# Altium PCB MotorCtrl.PcbDoc
Units mm, origin at the board's own origin, x right, y up, seen from the top; angles counter-clockwise.
Board outline 45.68 x 31.88 mm, 2 copper layers (Top Layer, Bottom Layer); 23 components, 24 nets, 97 pads, 258 vias.
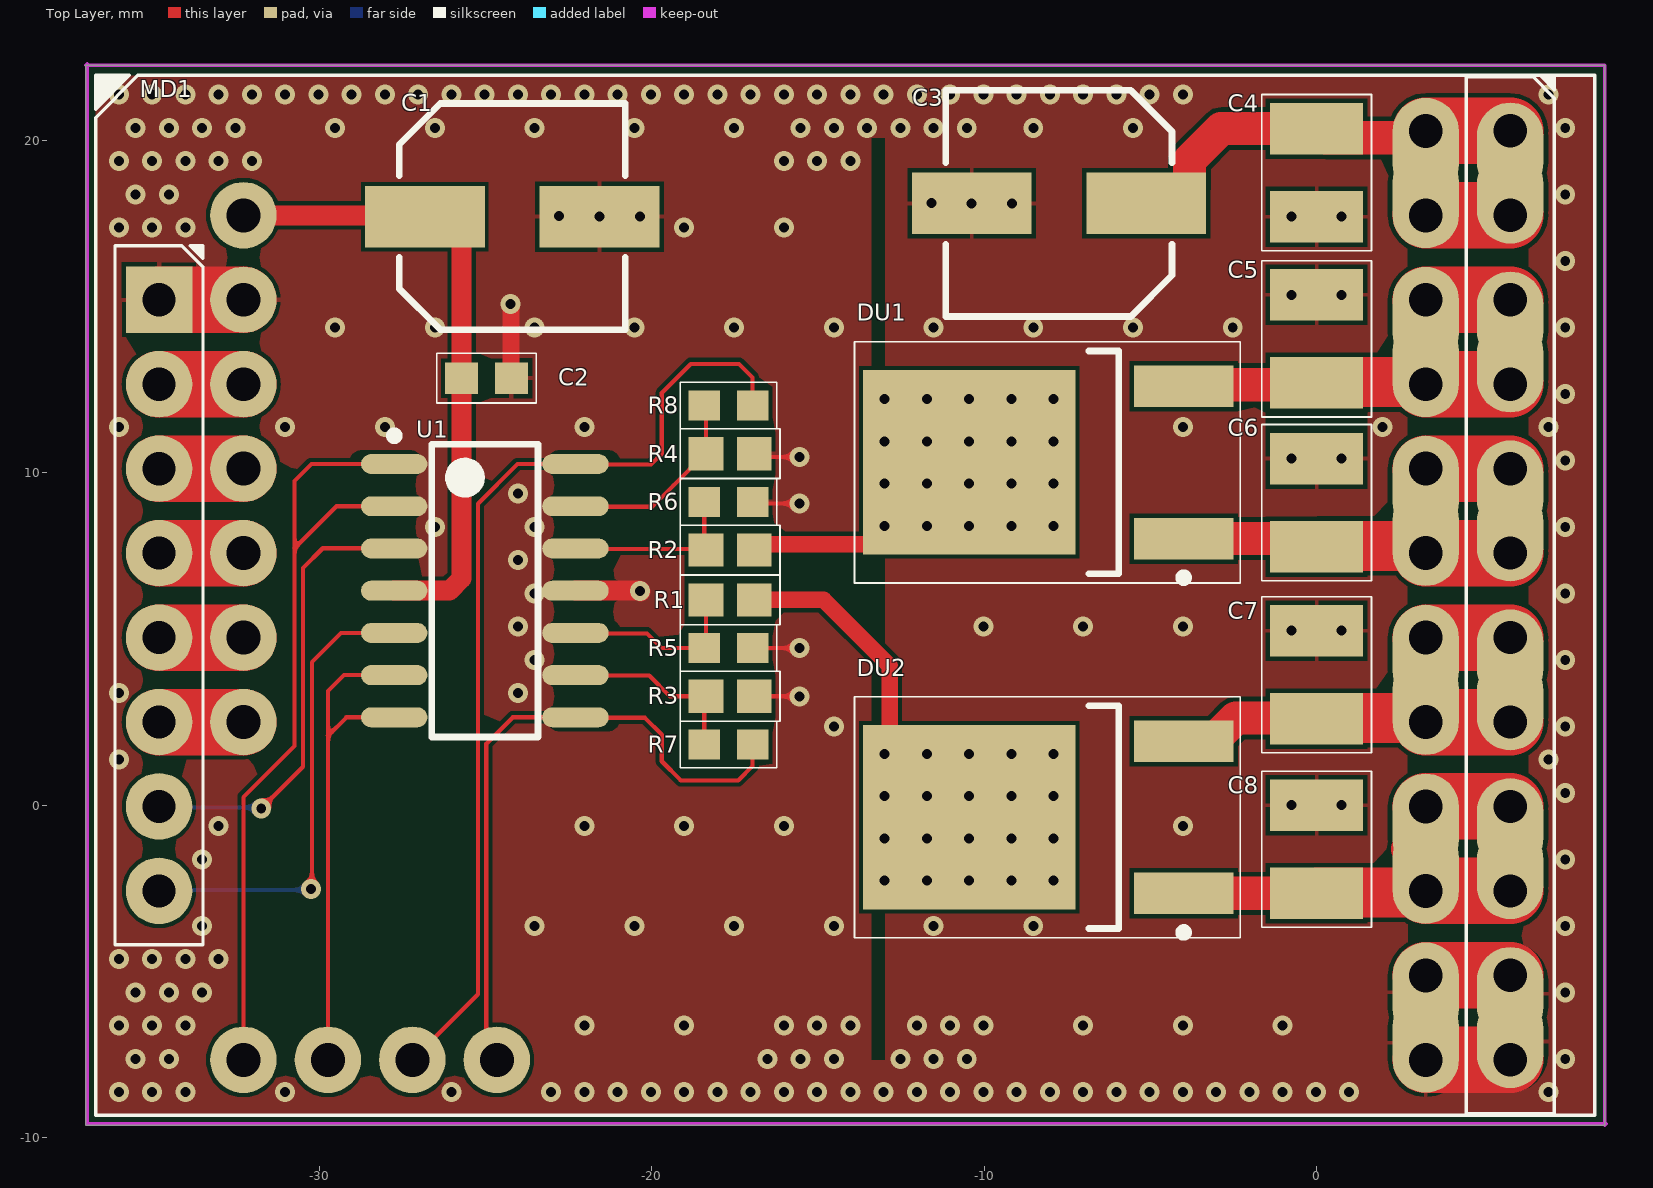
[diagram p0: Top Layer view]
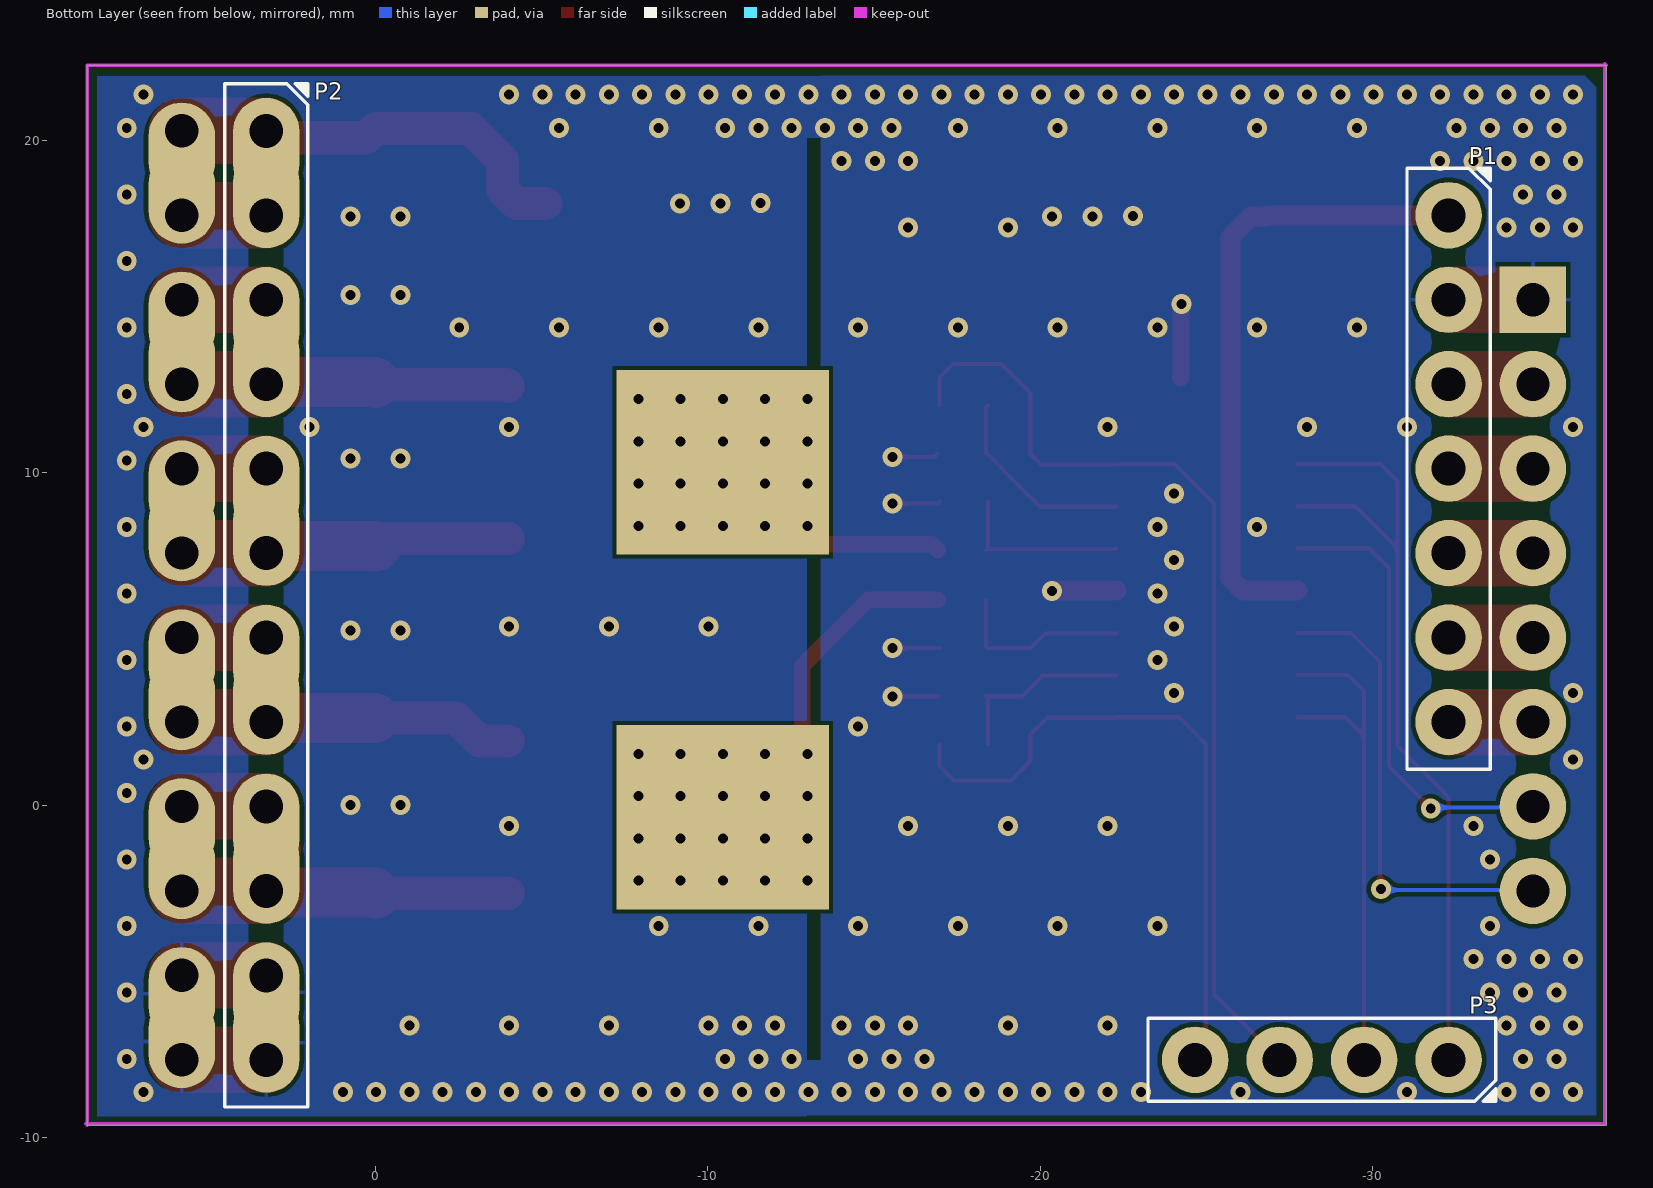
[diagram p1: Bottom Layer view, seen from below]
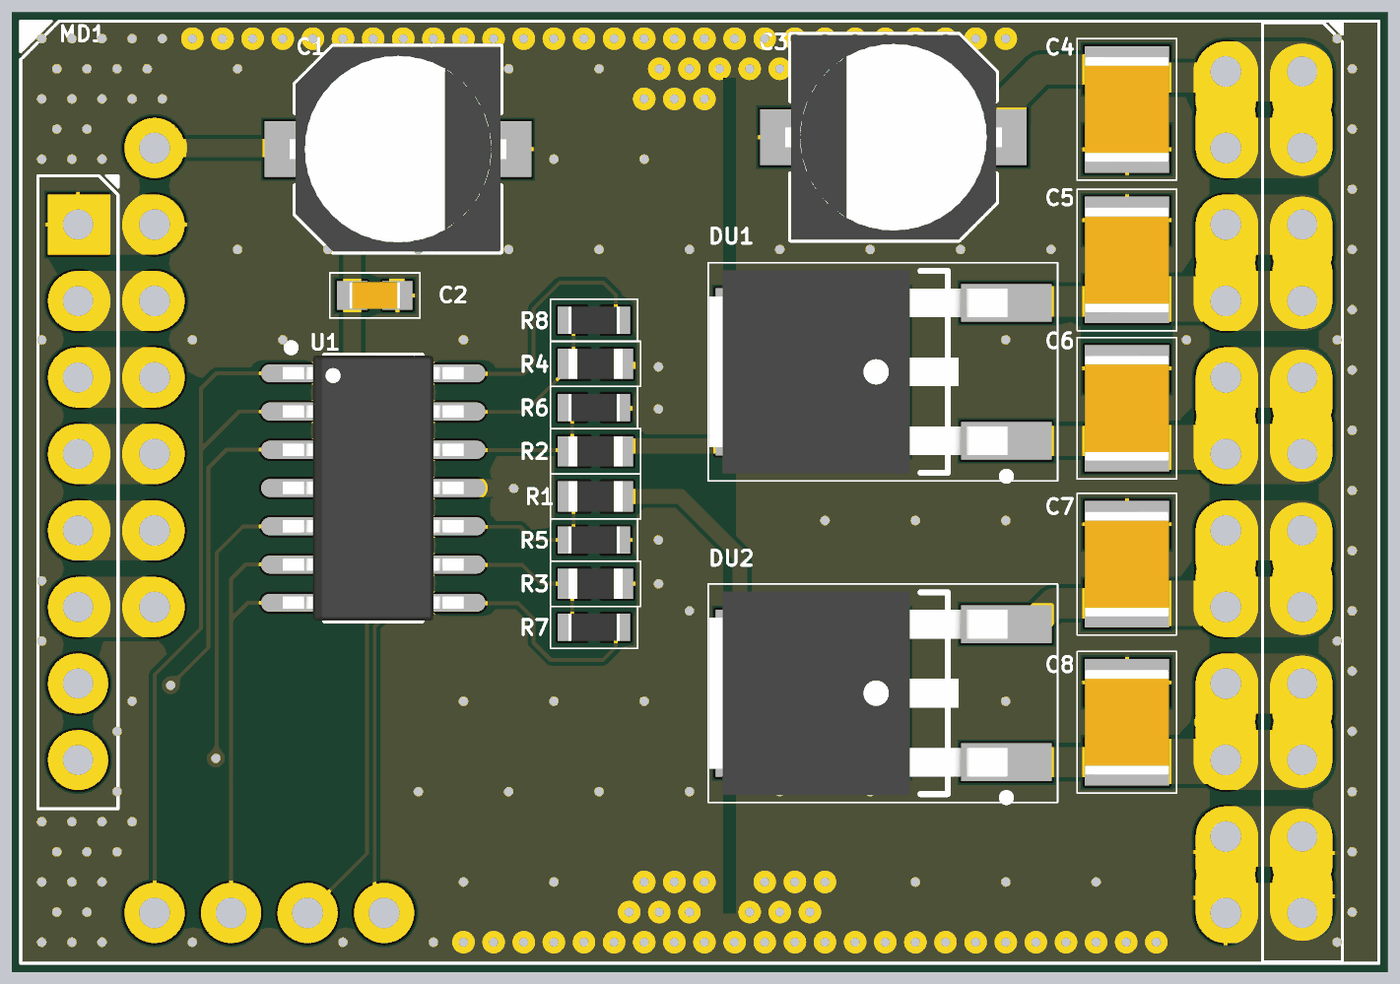
[diagram p2: 3D render of the assembled board from above, using the file's embedded part models]

## Layer stack, top to bottom
Top Solder: solder mask 0.0102, Solder Resist, Dk 3.5
Top Layer: signal copper 0.0356
Dielectric 1: dielectric 0.32, FR-4, Dk 4.8
Bottom Layer: signal copper 0.0356
Bottom Solder: solder mask 0.0102, Solder Resist, Dk 3.5

## Board outline
-37.022,-9.627 -37.022,22.252 8.662,22.252 8.662,-9.627

## Design rules (kind name [scope] priority, off if disabled: settings)
BoardOutlineClearance [All] p1: gap=0.2 ignorepadtopadclearanceinfootprint=FALSE
Clearance "Stitching A_GND" [IsStitchingVia and InNet('A_GND') vs (IsVia and (Not IsStitchingVia)) Or IsPad] p1: gap=0.127 ignorepadtopadclearanceinfootprint=FALSE
Clearance [All] p2: gap=0.127 ignorepadtopadclearanceinfootprint=TRUE except(0.25: Arc-Hole Track-Hole SMDPad-Hole THPad-Hole Via-Hole Fill-Hole Poly-Hole Region-Hole Text-Hole)
ComponentClearance [All] p1 off: gap=0.127 collisioncheckmode=3 verticalgap=0.127 showdistances=TRUE
DiffPairsRouting [All] p1: maxlimit=0.254 minlimit=0.127 mostfreqgap=0.127 toplayer_minwidth=0.127 toplayer_maxwidth=25.4 toplayer_prefwidth=0.127 bottomlayer_minwidth=0.127 bottomlayer_maxwidth=25.4 bottomlayer_prefwidth=0.127 maxuncoupledlength=12.7
FabricationTestpoint [All] p1: side=3 testpointundercomponent=TRUE minsize=1.016 maxsize=2.54 preferedsize=1.524 minholesize=0 maxholesize=1.016 preferedholesize=0.813 testpointgrid=0.025 allowsidetop=TRUE allowsidebottom=TRUE usegrid=TRUE gridtolerance=0
Height [All] p1: minheight=0 maxheight=1816.048 prefheight=12.7
HoleSize [All] p1: absolutevalues=TRUE maxlimit=6.3 minlimit=0.3 maxpercent=80.000 minpercent=20.000
HoleToHoleClearance [All] p1: gap=0.25 allowstackedmicrovias=FALSE
MinimumAnnularRing [All] p1: minimumring=0.076
MinimumSolderMaskSliver [All] p1: minsoldermaskwidth=0
PlaneClearance [All] p1: clearance=0.127
PlaneConnect PlaneConnectPowerPads [InPadClass('PowerPads')] p1: planeconnectstyle=Direct reliefexpansion=0.508 reliefentries=4 reliefconductorwidth=0.254 reliefairgap=0.254
PlaneConnect [All] p2: pad.planeconnectstyle=Relief pad.reliefexpansion=0.3 pad.reliefentries=4 pad.reliefconductorwidth=0.127 pad.reliefairgap=0.127 via.planeconnectstyle=Direct via.reliefexpansion=0.3 via.reliefentries=4 via.reliefconductorwidth=0.127 via.reliefairgap=0.127
PolygonConnect PolygonConnectPowerPads [All vs (InPadClass('PowerPads'))] p1: connectstyle=Direct reliefconductorwidth=0.254 reliefentries=4 polygonreliefangle="90 Angle" airgapwidth=0.254
PolygonConnect [All] p2: thpad.connectstyle=Relief thpad.reliefconductorwidth=0.127 thpad.reliefentries=4 thpad.polygonreliefangle="90 Angle" thpad.airgapwidth=0.127 smdpad.connectstyle=Relief smdpad.reliefconductorwidth=0.127 smdpad.reliefentries=4 smdpad.polygonreliefangle="90 Angle" smdpad.airgapwidth=0.127 via.connectstyle=Direct via.reliefconductorwidth=0.127 via.reliefentries=4 via.polygonreliefangle="90 Angle" via.airgapwidth=0.127
RoutingVias [All] p1: holewidth=0.3 width=0.6 viastyle="Through Hole" minholewidth=0.3 minwidth=0.6 maxholewidth=0.6 maxwidth=6.6
SilkToSilkClearance [All] p1: silktosilkclearance=0
SilkToSolderMaskClearance [IsPad] p1: minsilkscreentomaskgap=0.127 clearancetoexposedcopper=TRUE
SolderMaskExpansion [All] p1: expansion=0.075 istentingtop=FALSE
Width "Schematic Width Constraint" [InComponent('U1')] p1: maxlimit=0.6 minlimit=0.1 preferedwidth=0.2
Width [All] p2: maxlimit=25.4 minlimit=0.127 preferedwidth=0.2 minimp=50.000000 maximp=50.000000 favimp=50.000000
19 further rules are at their usual default settings.

## Components (designator, comment, footprint, x,y, rotation, side; value= is the part's Value field where it differs from the comment)
C1 "220uF" VZT221M1ETR-0607#1 -24.195,17.705 r0 top
C2 "0.1uF" CL10B104KA8NNNC -24.967,12.848 r180 top
C3 "220uF" VZT221M1ETR-0607#2 -7.75,18.1 r180 top
C4 "0.1uF" 1210B104K500NT 0,19.025 r270 top
C5 "0.1uF" 1210B104K500NT 0,14.025 r90 top
C6 "0.1uF" 1210B104K500NT 0,9.1 r90 top
C7 "0.1uF" 1210B104K500NT 0,3.925 r90 top
C8 "0.1uF" 1210B104K500NT 0,-1.325 r90 top
DU1 "MBRD1035CTLT4G" MBRD1035CTLT4G -10.45,10.31 r180 top
DU2 "MBRD1035CTLT4G" MBRD1035CTLT4G -10.45,-0.36 r180 top
MD1 "MD02" MD02 -34.817,15.202 r0 top locked
P1 "Header 7" KH-2.54PH180-1X7P-L11.5 -32.277,17.742 r270 bottom
P2 "Header 12" "KH-2.54PH180-1X12P-L11.5 (PAD LINKED)" 3.283,20.282 r270 bottom
P3 "Header 4" KH-2.54PH180-1X4P-L11.5 -23.237,-7.658 r0 bottom
R1 "12k" PTFR0603B12K0N9 -17.64,6.175 r0 top
R2 "12k" PTFR0603B12K0N9 -17.64,7.675 r0 top
R3 "12k" PTFR0603B12K0N9 -17.64,3.275 r0 top
R4 "12k" PTFR0603B12K0N9 -17.64,10.575 r0 top
R5 "3.3k" 0603WAF3301T5E -17.69,4.725 r0 top
R6 "3.3k" 0603WAF3301T5E -17.69,9.125 r0 top
R7 "3.3k" 0603WAF3301T5E -17.69,1.825 r180 top
R8 "3.3k" 0603WAF3301T5E -17.69,12.025 r180 top
U1 "OPA4277UA/2K5" OPA4277UA/2K5 -25.017,6.452 r0 top

## Footprints (in the part's own frame and the unit in brackets; to place one, negate y for a bottom-side part, rotate by r counter-clockwise, add the part's x,y. Pads: shape width x height; smd on the part's side, far side on the other; paste and mask are expansions set on the pad)
0603WAF3301T5E [mm] "0603 SMD 3.3k 1% Res"
  rect 0.95x0.9 smd: 1(-0.725,0) 2(0.725,0)
  silkscreen extent -1.45,-0.7 1.45,0.7, body extent -0.85,-0.45 0.85,0.45, height 0.55
1210B104K500NT [mm] "50V 100nF X7R ±10% 1210  Multilayer Ceramic Capacitors MLCC - SMD/SMT ROHS"
  rect 1.55x2.8 smd: 1(-1.325,0) 2(1.325,0)
  silkscreen extent -2.35,-1.65 2.35,1.65, body extent -1.75,-1.4 1.75,1.4, height 2.8
CL10B104KA8NNNC [mm] "0603 25V 100nF MLCC"
  rect 1x0.95 smd: 1(-0.75,0) 2(0.75,0)
  silkscreen extent -1.5,-0.75 1.5,0.75, body extent -0.85,-0.45 0.85,0.45, height 0.55
KH-2.54PH180-1X4P-L11.5 [mm] "1x4P Pin Headers"
  round 2 hole 1.02: 1(-9.04,0) 2(-6.5,0) 3(-3.96,0) 4(-1.42,0)
  silkscreen extent -10.46,-1.25 0,1.25, body extent -10.46,-1.25 0,1.25, height 8.9
KH-2.54PH180-1X7P-L11.5 [mm] "1x7P Pin Headers"
  round 2 hole 1.02: 1(0,0) 2(2.54,0) 3(5.08,0) 4(7.62,0) 5(10.16,0) 6(12.7,0) 7(15.24,0)
  silkscreen extent -1.42,-1.25 16.66,1.25, body extent -1.42,-1.25 16.66,1.25, height 8.9
"KH-2.54PH180-1X12P-L11.5 (PAD LINKED)" [mm] "Two Pad Linked, 1x12P Pin Headers"
  oval 3x2 hole 1.02 copper offset 0.51,0: 1(0,0) 3(5.08,0) 5(10.16,0) 7(15.24,0) 9(20.32,0) 11(25.4,0)
  oval 3x2 hole 1.02 copper offset -0.51,0: 2(2.54,0) 4(7.62,0) 6(12.7,0) 8(17.78,0) 10(22.86,0) 12(27.94,0)
  silkscreen extent -1.42,-1.25 29.36,1.25, body extent -1.42,-1.25 29.36,1.25, height 8.9
MBRD1035CTLT4G [mm] "35V 5A 2Channel Diode IC"
  rect 3x1.25 smd: 1(-6.45,2.29) 3(-6.45,-2.29)
  rect 6.4x5.55 smd: 4(0,0)
  rect 6.4x5.55 smd far side: 4(0,0)
  silkscreen extent -8.15,-3.62 3.45,3.63, body extent -6.49,-3.37 3.41,3.37, height 2.51
MD02 [mm] "MD02_17A_Motor_Driver"
  rect 2x2 hole 1: 1(0,0)
  round 2 hole 1: 2(0,-2.54) 3(0,-5.08) 4(0,-7.62) 5(0,-10.16) 6(0,-12.7) 7(0,-15.24) 8(0,-17.78)
  oval 2x2.8 hole 1 copper offset 0,0.55: 9(40.64,2.54) 10(40.64,-2.54) 11(40.64,-7.62) 12(40.64,-12.7) 13(40.64,-17.78) 14(40.64,-22.86)
  oval 2x2.8 hole 1 copper offset 0,-0.55: 9(40.64,5.08) 10(40.64,0) 11(40.64,-5.08) 12(40.64,-10.16) 13(40.64,-15.24) 14(40.64,-20.32)
  silkscreen extent -1.91,-24.53 43.18,6.75, body extent -1.34,-24.48 41.97,6.73, height 8.65
OPA4277UA/2K5 [mm] "SOP-14_3.9x8.7x1.27P"
  oval 2x0.6 smd: 1(-2.725,3.81) 2(-2.725,2.54) 3(-2.725,1.27) 4(-2.725,0) 5(-2.725,-1.27) 6(-2.725,-2.54) 7(-2.725,-3.81) 8(2.725,-3.81) 9(2.725,-2.54) 10(2.725,-1.27) 11(2.725,0) 12(2.725,1.27) 13(2.725,2.54) 14(2.725,3.81)
  silkscreen extent -2.85,-4.4 1.6,4.78, body extent -3,-4.4 3,4.4, height 1.75
PTFR0603B12K0N9 [mm] "0603 SMD 12k 0.1% Res"
  rect 1.05x1 smd: 1(-0.725,0) 2(0.725,0)
  silkscreen extent -1.5,-0.75 1.5,0.75, body extent -0.9,-0.5 0.9,0.5, height 0.5
VZT221M1ETR-0607#1 [mm] "SMD 6.3x7.7mm 220uF 25V Capacitor"
  rect 3.6x1.85 smd: 1(-2.625,0) ""(2.625,0)
  silkscreen extent -3.4,-3.4 3.4,3.4, body extent -3.6,-3.4 3.6,3.4, height 8
VZT221M1ETR-0607#2 [mm] "SMD 6.3x7.7mm 220uF 25V Capacitor"
  rect 3.6x1.85 smd: 1(-2.625,0) 2(2.625,0)
  silkscreen extent -3.4,-3.4 3.4,3.4, body extent -3.6,-3.4 3.6,3.4, height 8

## Part data
C1 C3: library part "Cap Pol1", "-45℃~+105℃ 2000hrs@105℃ 220uF 7.7mm 25V 6.3mm ±20% SMD,6.3x7.7mm  Aluminum Electrolytic Capacitors - SMD ROHS", LatestRevisionDate=17-Jul-2002, LatestRevisionNote="Re-released for DXP Platform.", PackageDescription="Polarized Capacitor (Radial); 2 Leads", PackageReference=RB7.6-15, Published=8-Jun-2000, Publisher="Altium Limited"
C2: library part "Cap Semi", "25V 100nF X7R ±10% 0603  Multilayer Ceramic Capacitors MLCC - SMD/SMT ROHS", LatestRevisionDate=29-May-2009, LatestRevisionNote="IPC-7351 Footprint Added.", PackageDescription="Chip Capacitor", PackageReference=C1206, Published=8-Jun-2000, Publisher="Altium Limited"
C4 C5 C6 C7 C8: library part "Cap Semi", "50V 100nF X7R ±10% 1210  Multilayer Ceramic Capacitors MLCC - SMD/SMT ROHS", LatestRevisionDate=29-May-2009, LatestRevisionNote="IPC-7351 Footprint Added.", PackageDescription="Chip Capacitor", PackageReference=C1206, Published=8-Jun-2000, Publisher="Altium Limited"
DU1 DU2: "35V 470mV@5A 5A TO-252-2(DPAK) Schottky Barrier Diodes (SBD) ROHS", buy_link=https://www.ruten.com.tw/item/show?21744290003226, datasheet=https://datasheet.ciiva.com/905/mbrd1035ctl-d-905952.pdf?src-supplier=Digi-Key
MD1: library part "MD02 Motor Driver", "MD02 17A 2 cheel motor driver", buy_link=https://www.ruten.com.tw/item/show?21811773783671
P1: "3A Straight Square Pins 2.5mm 6mm -40℃~+105℃ 1 7 3mm 2.54mm Black 1x7P Plugin,P=2.54mm  Pin Headers ROHS", LatestRevisionDate=17-Jul-2002, LatestRevisionNote="Re-released for DXP Platform.", Publisher="Altium Limited"
P2: "3A Straight Square Pins 2.5mm 6mm -40℃~+105℃ 1 12 3mm 2.54mm Black 1x12P Plugin,P=2.54mm  Pin Headers ROHS", LatestRevisionDate=17-Jul-2002, LatestRevisionNote="Re-released for DXP Platform.", Publisher="Altium Limited"
P3: "3A Straight Square Pins 2.5mm 6mm -40℃~+105℃ 1 4 3mm 2.54mm Black 1x4P Plugin,P=2.54mm  Pin Headers ROHS", LatestRevisionDate=17-Jul-2002, LatestRevisionNote="Re-released for DXP Platform.", Publisher="Altium Limited"
R1 R2 R3 R4 R5 R6 R7 R8: library part Res1, "Resistor", LatestRevisionDate=17-Jul-2002, LatestRevisionNote="Re-released for DXP Platform.", PackageDescription="Axial Device, Thru-Hole; 2 Leads; 0.3 in Pin Spacing", PackageReference=AXIAL-0.3, Published=8-Jun-2000, Publisher="Altium Limited"
U1: "790μA 1MHz 4 4V~36V,±2V~18V 0.8 V/us General Purpose SOIC-14  Precision OpAmps ROHS"

## Via types
v1: diameter 0.6, hole 0.3, Top Layer to Bottom Layer, 136 vias
v2: diameter 0.6, hole 0.3, Top Layer to Bottom Layer, tented both sides, 122 vias

## Nets (pads, with @x,y where several pads share a name; then routed paths per layer and width w, separated by ;. In a path a pad name is that pad's centre, name@x,y a point inside that pad or via, vN(x,y) a via of type N, cw(c..) or ccw(c..) an arc to the next point about the centre after c; other vN are vias at no path point)
A_12V: C3.1 C4.1 MD1.9 P2.1 P2.2 | length 15.2
  Top Layer w1: C3.1 -4.25,18.1 -3.825,18.525 -3.825,19.4 -2.875,20.35 C4.1 0.275,20.075 3.075,20.075 P2.1 ; P2.2@3.213,17.673 P2.2
  Top Layer w2: P2.2 MD1.9@5.823,17.742 ; P2.1 MD1.9@5.823,20.282
A_GND: C1. C2.1 C3.2 C4.2 C5.2 C6.2 C7.2 C8.2 MD1.1 MD1.14 P1.2 P2.11 P2.12 R3.2 R4.2 R5.2 R6.2 U1.11 | length 17.4
  Top Layer w0.127: R5.2 v2(-15.55,4.725) ; R6.2 -16.916,9.075 v2(-15.55,9.075) ; R3.2 -15.55,3.275 v2(-15.548,3.273) ; R4.2 -16.816,10.475 v2(-15.55,10.475)
  Top Layer w0.5: v2(-24.247,15.072) -24.232,15.057 -24.232,12.863 C2.1
  Top Layer w0.6: U1.11 -20.367,6.452 v2(-20.355,6.44) v2@-20.342,6.428
  Top Layer w2: MD1.1 P1.2 ; P2.12 MD1.14@5.823,-7.658 ; P2.11 MD1.14@5.823,-5.118
  other v1: -22.022,-8.627 -21.022,-8.627 -20.022,-8.627 -19.022,-8.627 -18.022,-8.627 -17.022,-8.627 -16.022,-8.627 -15.022,-8.627 -14.022,-8.627 -13.022,-8.627 -12.022,-8.627 -11.022,-8.627 -10.022,-8.627 -9.022,-8.627 -8.022,-8.627 -7.022,-8.627 -6.022,-8.627 -5.022,-8.627 -4.022,-8.627 -3.022,-8.627 -2.022,-8.627 -1.022,-8.627 -0.022,-8.627 0.978,-8.627 -16.522,-7.627 -15.522,-7.627 -14.522,-7.627 -12.522,-7.627 -11.522,-7.627 -10.522,-7.627 -16.022,-6.627 -15.022,-6.627 -14.022,-6.627 -12.022,-6.627 -11.022,-6.627 -10.022,-6.627 -0.75,0 0.75,0 -24.022,3.373 -23.522,4.373 -0.75,5.25 0.75,5.25 -24.022,5.373 -23.522,6.373 -24.022,7.373 -23.522,8.373 -24.022,9.373 -0.75,10.425 0.75,10.425 -0.75,15.35 0.75,15.35 -21.57,17.705 -20.354,17.705 -0.75,17.7 0.75,17.7 -22.785,17.721 -11.59,18.116 -10.375,18.1 -9.159,18.1 -16.022,19.373 -15.022,19.373 -14.022,19.373 -15.522,20.373 -14.522,20.373 -13.522,20.373 -12.522,20.373 -11.522,20.373 -10.522,20.373 -31.022,21.373 -30.022,21.373 -29.022,21.373 -28.022,21.373 -27.022,21.373 -26.022,21.373 -25.022,21.373 -24.022,21.373 -23.022,21.373 -22.022,21.373 -21.022,21.373 -20.022,21.373 -19.022,21.373 -18.022,21.373 -17.022,21.373 -16.022,21.373 -15.022,21.373 -14.022,21.373 -13.022,21.373 -12.022,21.373 -11.022,21.373 -10.022,21.373 -9.022,21.373 -8.022,21.373 -7.022,21.373 -6.022,21.373 -5.022,21.373 -4.022,21.373
  other v2: -36.022,-8.627 -35.022,-8.627 -34.022,-8.627 -31.022,-8.627 -26.022,-8.627 -23.022,-8.627 6.978,-8.627 -35.522,-7.627 -34.522,-7.627 7.478,-7.627 -36.022,-6.627 -35.022,-6.627 -34.022,-6.628 -34.022,-6.627 -22.023,-6.628 -19.023,-6.628 -16.023,-6.628 -10.023,-6.628 -7.023,-6.628 -4.023,-6.628 -1.023,-6.628 -35.522,-5.627 -34.522,-5.627 -33.522,-5.627 7.478,-5.627 -36.022,-4.627 -35.022,-4.627 -34.022,-4.627 -33.022,-4.627 -33.522,-3.627 -23.523,-3.628 -20.523,-3.628 -17.523,-3.628 -14.523,-3.628 -11.523,-3.628 -8.523,-3.628 7.478,-3.627 -33.522,-1.627 7.478,-1.627 -33.022,-0.627 -22.023,-0.628 -19.023,-0.628 -16.023,-0.628 -4.023,-0.628 7.478,0.373 -36.022,1.373 6.978,1.373 -14.523,2.372 7.478,2.373 -36.022,3.373 7.478,4.373 -10.023,5.372 -7.023,5.372 -4.023,5.372 7.478,6.373 -26.523,8.372 -23.523,8.372 7.478,8.373 7.478,10.373 -36.022,11.373 -31.023,11.372 -28.023,11.372 -22.023,11.372 -4.023,11.372 1.977,11.372 6.978,11.373 7.478,12.373 -29.523,14.372 -26.523,14.372 -23.523,14.372 -20.523,14.372 -17.523,14.372 -14.523,14.372 -11.523,14.372 -8.523,14.372 -5.523,14.372 -2.523,14.372 7.478,14.373 7.478,16.373 -36.022,17.373 -35.022,17.373 -34.022,17.372 -34.022,17.373 -19.023,17.372 -16.023,17.372 -35.522,18.373 -34.522,18.373 7.478,18.373 -36.022,19.373 -35.022,19.373 -34.022,19.373 -33.022,19.373 -32.022,19.373 -35.522,20.373 -34.522,20.373 -33.522,20.373 -32.523,20.372 -32.522,20.373 -29.523,20.372 -26.523,20.372 -23.523,20.372 -20.523,20.372 -17.523,20.372 -14.523,20.372 -11.523,20.372 -8.523,20.372 -5.523,20.372 7.478,20.373 -36.022,21.373 -35.022,21.373 -34.022,21.373 -33.022,21.373 -32.022,21.373 6.978,21.373
CSA_Origin: MD1.7 U1.3 | length 13.8
  Top Layer w0.127: v2(-31.742,-0.098) -30.488,1.157 -30.488,7.132 -29.893,7.728 -27.748,7.728 U1.3
  Bottom Layer w0.127: MD1.7 -34.787,-0.068 -31.772,-0.068 v2(-31.742,-0.098)
CSB_Origin: MD1.8 U1.5 | length 14.3
  Top Layer w0.127: v2(-30.242,-2.522) -30.217,-2.497 -30.217,4.303 -29.342,5.178 -27.747,5.178 U1.5
  Bottom Layer w0.127: MD1.8 -34.79,-2.55 -30.27,-2.55 v2(-30.242,-2.522)
D_5V: C1.1 C2.2 P1.1 U1.4 | length 19.3
  Top Layer w0.6: P1.1 -26.858,17.742 C1.1 -26.342,17.705 -25.717,17.08 C2.2 -25.717,6.818 -26.083,6.452 U1.4
Drive_EN: MD1.6 P1.7 | length 2.5
  Top Layer w2: MD1.6 P1.7
MA1: C5.1 DU1.3 MD1.10 P2.3 P2.4 | length 12.4
  Top Layer w1: DU1.3 -3.95,12.65 -0.05,12.65 C5.1
  Top Layer w1.5: C5.1 0.025,12.725 3.22,12.725 P2.4
  Top Layer w2: P2.4 MD1.10@5.823,12.662 ; P2.3 MD1.10@5.823,15.202
MA2: C6.1 DU1.1 MD1.11 P2.5 P2.6 | length 12.6
  Top Layer w1: DU1.1 -0.245,8.02 C6.1
  Top Layer w1.5: C6.1 0.025,7.8 3.065,7.8 P2.6
  Top Layer w2: P2.6 MD1.11@5.823,7.582 ; P2.5 MD1.11@5.823,10.122
MA_DIR: MD1.2 P1.3 | length 2.5
  Top Layer w2: MD1.2 P1.3
MA_PWM: MD1.3 P1.4 | length 2.5
  Top Layer w2: MD1.3 P1.4
MAV_Origin: DU1.4 R2.2 | length 9.9
  Top Layer w0.5: R2.2 -16.738,7.852 DU1.4@-13.518,7.852 ; DU1.4@-11.97,9.675 -11.833,9.538 -13.102,8.268 DU1.4@-13.518,7.852 ; DU1.4@-10.7,10.31 -11.06,10.31 DU1.4@-13.518,7.852
  other v1: -12.99,8.405 -11.72,8.405 -10.45,8.405 -9.18,8.405 -7.91,8.405 -12.99,9.675 -11.72,9.675 -10.45,9.675 -9.18,9.675 -7.91,9.675 -12.99,10.945 -11.72,10.945 -10.45,10.945 -9.18,10.945 -7.91,10.945 -12.99,12.215 -11.72,12.215 -10.45,12.215 -9.18,12.215 -7.91,12.215
MB1: C7.1 DU2.3 MD1.12 P2.7 P2.8 | length 12.7
  Top Layer w1: DU2.3 -3.125,1.93 -2.43,2.625 C7.1@0.025,2.625
  Top Layer w1.5: C7.1@0.025,2.625 3.16,2.625 P2.8
  Top Layer w2: P2.8 MD1.12@5.823,2.502 ; P2.7 MD1.12@5.823,5.042
MB2: C8.1 DU2.1 MD1.13 P2.9 P2.10 | length 15.4
  Top Layer w1: DU2.1 C8.1 ; P2.10 3.283,-1.838 2.762,-1.318 2.742,-1.318 3.283,-0.777 P2.9
  Top Layer w1.5: C8.1 0.025,-2.625 3.235,-2.625 P2.10
  Top Layer w2: P2.10 MD1.13@5.823,-2.578 ; P2.9 MD1.13@5.823,-0.038
MB_DIR: MD1.4 P1.5 | length 2.5
  Top Layer w2: MD1.4 P1.5
MB_PWM: MD1.5 P1.6 | length 2.5
  Top Layer w2: MD1.5 P1.6
MBV_Origin: DU2.4 R1.2 | length 10.4
  Top Layer w0.5: R1.2 -14.825,6.175 -12.845,4.195 -12.845,2.165 -12.225,1.545 -10.45,-0.23 DU2.4@-10.45,-0.36
  other v1: -12.99,-2.265 -11.72,-2.265 -10.45,-2.265 -9.18,-2.265 -7.91,-2.265 -12.99,-0.995 -11.72,-0.995 -10.45,-0.995 -9.18,-0.995 -7.91,-0.995 -12.99,0.275 -11.72,0.275 -10.45,0.275 -9.18,0.275 -7.91,0.275 -12.99,1.545 -11.72,1.545 -10.45,1.545 -9.18,1.545 -7.91,1.545
NetR1_1: R1.1 R5.1 U1.10 | length 5.5
  Top Layer w0.127: U1.10 -22.278,5.168 -20.142,5.168 -19.7,4.725 R5.1 -18.365,4.775 R1.1
NetR2_1: R2.1 R6.1 U1.12 | length 5.4
  Top Layer w0.127: U1.12 -22.278,7.708 R2.1@-18.398,7.708 ; R6.1 -18.415,7.725 R2.1@-18.398,7.708 ; R2.1 R2.1@-18.398,7.708
NetR3_1: R3.1 R7.2 U1.9 | length 5.7
  Top Layer w0.127: U1.9 -22.278,3.898 -20.072,3.898 -19.45,3.275 R3.1 -18.415,3.225 R7.2
NetR4_1: R4.1 R8.2 U1.13 | length 6.1
  Top Layer w0.127: U1.13 -22.278,8.978 -19.987,8.978 -19.36,9.605 -18.39,10.575 R4.1 -18.365,11.975 R8.2
OPA_CA: P3.1 U1.1 U1.2 | length 24.8
  Top Layer w0.127: P3.1 -32.277,0.243 -30.742,1.778 -30.742,7.728 ; U1.2 -29.478,8.992 -30.742,7.728 ; U1.1 -30.232,10.262 -30.742,9.753 -30.742,7.728
OPA_CB: P3.2 U1.6 U1.7 | length 15.5
  Top Layer w0.127: P3.2 -29.737,2.088 ; U1.7 -29.183,2.642 -29.737,2.088 ; U1.6 -29.258,3.912 -29.737,3.433 -29.737,2.088
OPA_VA: P3.3 R8.1 U1.14 | length 29.6
  Top Layer w0.127: P3.3 -25.227,-5.687 -25.227,9.068 -24.032,10.262 U1.14 -22.278,10.248 -20.022,10.248 -19.697,10.572 -19.697,12.398 -18.822,13.273 -17.373,13.273 -16.965,12.865 R8.1
OPA_VB: P3.4 R7.1 U1.8 | length 20.1
  Top Layer w0.127: P3.4 -24.973,-7.342 -24.973,1.847 -24.177,2.642 U1.8 -22.278,2.628 -20.202,2.628 -19.697,2.123 -19.697,1.323 -19.122,0.748 -17.397,0.748 -16.965,1.18 R7.1
  Bottom Layer w0.127: P3.4@-24.665,-7.65 P3.4

## Polygon pours and split planes (outlines as drawn)
A_GND on Bottom Layer "A_GND_L02_P001" (solid, remove dead copper, pour order 1): -36.722,21.952 -36.722,-9.327 -11.372,-9.327 -11.372,-7.673 -13.396,-7.673 -13.396,21.947 -15.847,21.947
A_GND on Bottom Layer "A_GND_L02_P005" (solid, remove dead copper, pour order 5): 8.359,-9.36 -12.976,-9.36 -12.976,20.077 -15.726,20.077 -15.726,21.92 8.359,21.92
A_GND on Top Layer "A_GND_L01_P004" (solid, remove dead copper, pour order 4): -36.722,21.952 -36.722,-9.327 -11.372,-9.327 -11.372,-7.673 -13.396,-7.673 -13.396,21.947 -15.847,21.947
A_GND on Top Layer "A_GND_L01_P000" (solid, remove dead copper, pour order 0): 8.363,-9.327 -12.972,-9.327 -12.972,20.077 -15.722,20.077 -15.722,21.952 8.363,21.952

## Keep-outs
Keep-Out Layer:
  lines w0.1: -37.022,22.252 8.662,22.252 8.662,-9.628 ; -36.972,22.302 -36.972,-9.577 8.712,-9.577